# EAGLE board temp_brick_smd (EAGLE 7.2.0)
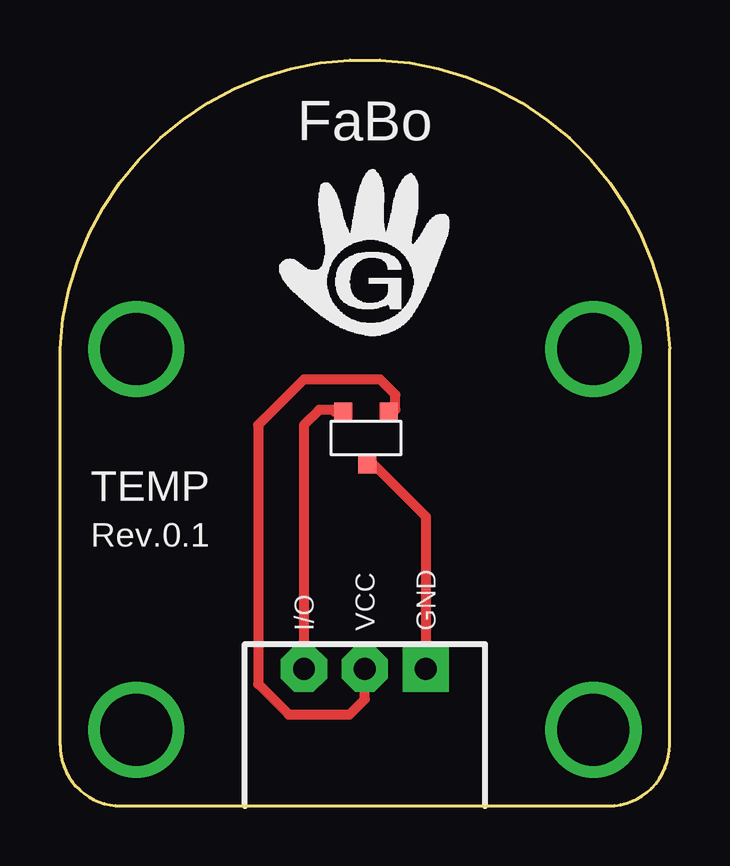
[diagram p0: board, top side]
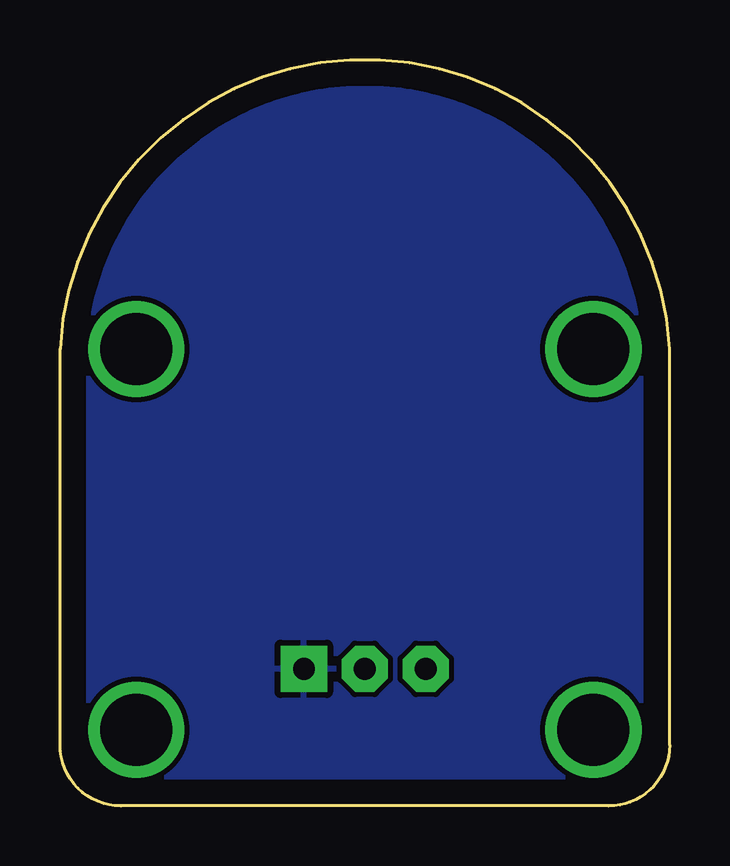
[diagram p1: board, bottom side, seen from below]

Size 25.4 x 31.1 mm. Coordinates in mm from the lower left corner, seen from the top.
Copper layers (1*16): Top 0.035mm / dielectric 1.5mm / Bottom 0.035mm
Design rules "default": minimum track width 10mil, minimum drill 24mil, track to track 8mil, track to pad 8mil, pad to pad 8mil, via to via 8mil, smd to smd 8mil, copper to edge 40mil, drill to drill 8mil, minimum pad ring 10mil, minimum via ring 8mil, stop-mask expansion 4mil, vias tented up to drill 0mil, thermal gap 10mil

## Footprints (pad centres in the part's own frame; a part is rotated, then mirrored left to right if it is on the bottom)
BRICK_3PIN = drill 0.9 pad 1.93 square: GND 2.54,-9.525 | drill 0.9 pad 1.93 octagon: IN/OUT -2.54,-9.525; VCC 0,-9.525 | drill 3 pad 3.81: P$1 -9.525,3.81; P$2 9.525,3.81; P$3 9.525,-12.065; P$4 -9.525,-12.065
SENSOR-LM60-SOT-23 = smd 0.76 x 0.76: GND -0.1,1; OUT 0.9,-1.2; VCC -1,-1.2

## Placement (x,y rotation side)
J1  BRICK_3PIN  [BRICK_3PIN]  12.7,15.24 0 top
U1  SENSOR-LM60-SOT  [SENSOR-LM60-SOT-23]  12.7,15.24 180 top

## Library data of the parts
J1 U1 = Gclue

## Nets
GND: J1.GND U1.GND
IN: J1.IN/OUT U1.OUT
VCC: J1.VCC U1.VCC

## Tracks (layer width: path | path; a pad name or v marks a point on that pad's centre or on a via)
GND
  Top 0.406: U1.GND 13.06,14.24 15.24,12.06 J1.GND
  pour Bottom: -0.64,-0.63 26.04,-0.63 26.04,31.75 -0.64,31.75
IN
  Top 0.406: U1.OUT 11.43,16.44 11.43,16.51 10.79,16.51 10.16,15.88 J1.IN/OUT
VCC
  Top 0.406: U1.VCC 13.9,16.44 13.97,16.51 13.97,17.15 13.33,17.78 10.16,17.78 8.25,15.88 8.25,5.08 9.52,3.81 12.06,3.81 12.7,4.45 J1.VCC

## Text on the board
tPlace: TEMP | Rev.0.1